# Altium PCB PCB1.PcbDoc
Units mil, origin at the board's own origin, x right, y up, seen from the top; angles counter-clockwise.
Board outline 2000 x 980 mil, 2 copper layers (Top Layer, Bottom Layer), stack 69.792 mil thick; 24 components, 19 nets, 60 pads, 89 vias.
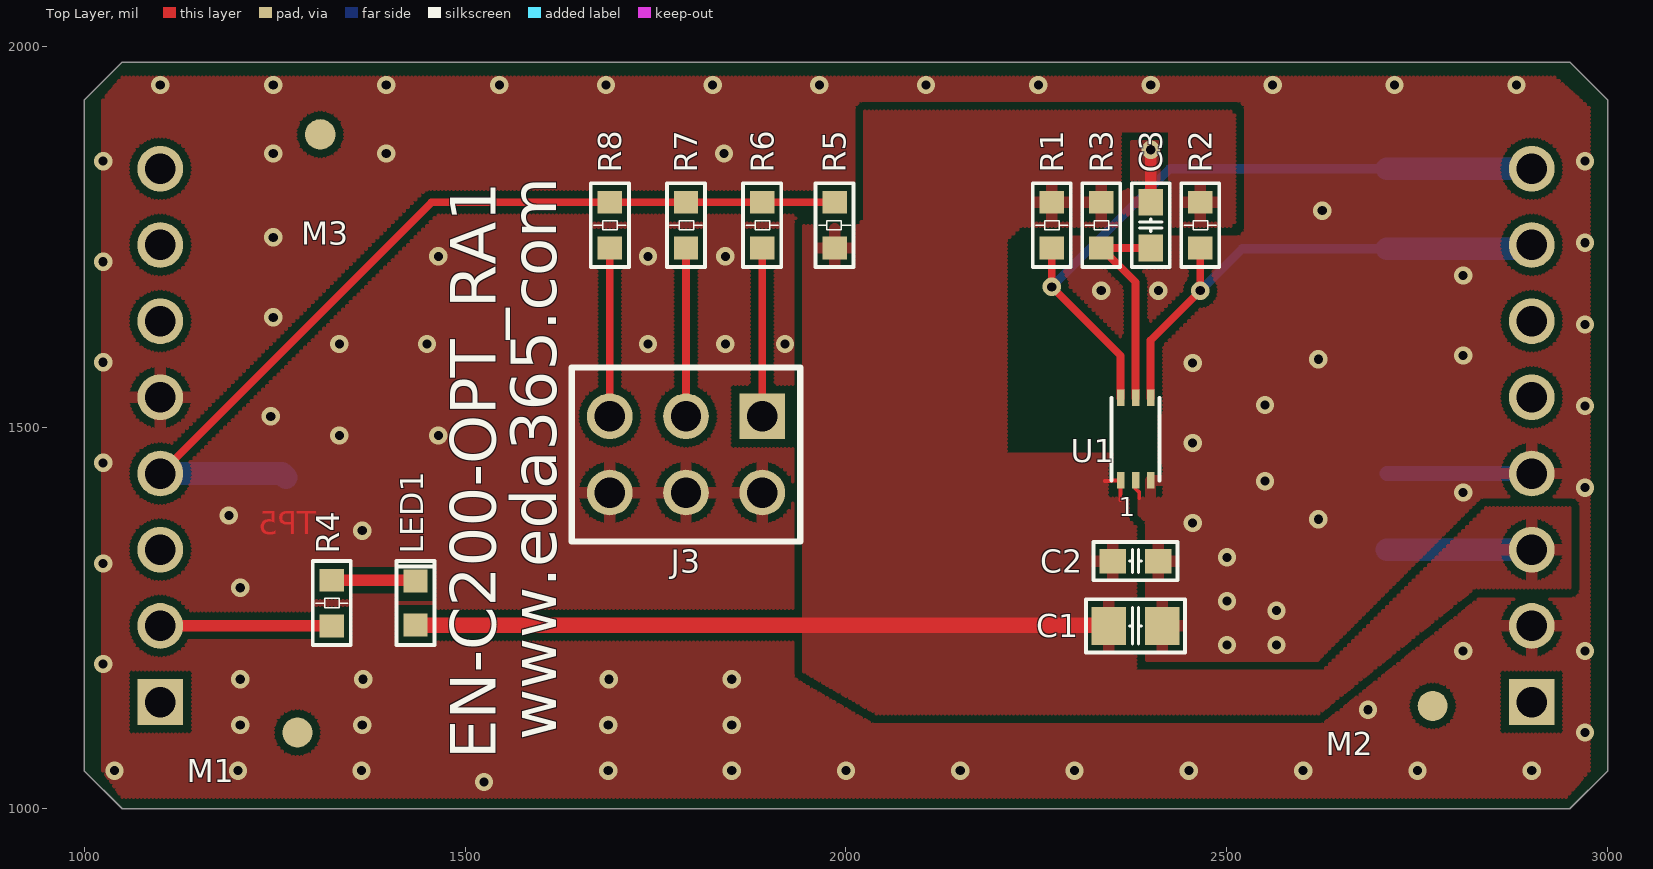
[diagram p0: Top Layer view]
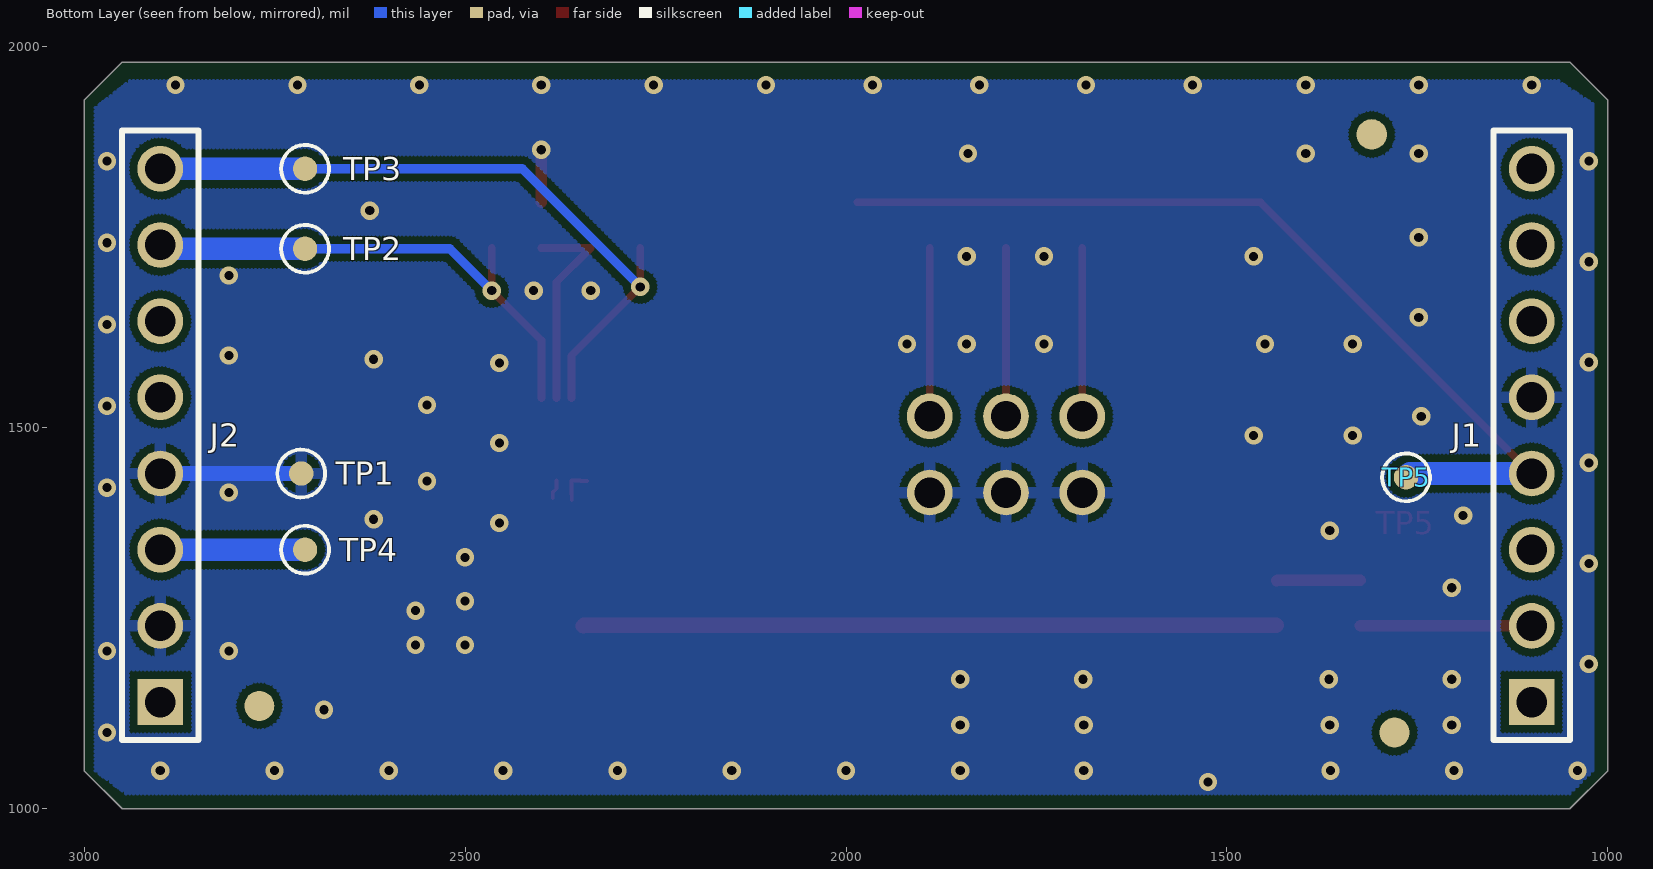
[diagram p1: Bottom Layer view, seen from below]

## Layer stack, top to bottom
Top Layer: signal copper 1.4
Dielectric: core 66.992, FR-4, Dk 4.2
Bottom Layer: signal copper 1.4

## Board outline
1050,1000 1000,1050 1000,1930 1050,1980 2950,1980 3000,1930 3000,1050 2950,1000

## Design rules (kind name [scope] priority, off if disabled: settings)
AssemblyTestPointUsage [All] p0: scope1count=1 scope1_0_kind=Board scope1_0_value=Board scope2count=1 scope2_0_kind=Board scope2_0_value=Board commentlength=0
AssemblyTestpoint [All] p0: scope1count=1 scope1_0_kind=Board scope1_0_value=Board scope2count=1 scope2_0_kind=Board scope2_0_value=Board commentlength=0
Clearance Clearance_2 [All] p0 off: scope1count=1 scope1_0_kind=Board scope1_0_value=Board scope2count=1 scope2_0_kind=Board scope2_0_value=Board commentlength=66 gap=12 // Protel DXP Scope 1 Expression Was: (OnLayer('Keep-Out Layer'))
Clearance Clearance_1 [All] p0 off: scope1count=1 scope1_0_kind=Board scope1_0_value=Board scope2count=1 scope2_0_kind=Board scope2_0_value=Board commentlength=45 gap=10 // Protel DXP Scope 1 Expression Was: Inpoly
Clearance [All] p0: scope1count=1 scope1_0_kind=Board scope1_0_value=Board scope2count=1 scope2_0_kind=Board scope2_0_value=Board commentlength=0 gap=6
Clearance Clearance_2 [(OnLayer('Keep-Out Layer'))] p1: gap=12
Clearance Clearance_1 [Inpoly] p2: gap=10
Clearance [All] p3: gap=6
ComponentClearance [All] p0: scope1count=1 scope1_0_kind=Board scope1_0_value=Board scope2count=1 scope2_0_kind=Board scope2_0_value=Board commentlength=0 gap=10 collisioncheckmode=3
DiffPairsRouting [All] p0: scope1count=1 scope1_0_kind=Board scope1_0_value=Board scope2count=1 scope2_0_kind=Board scope2_0_value=Board commentlength=0
FabricationTestPointUsage [All] p0: scope1count=1 scope1_0_kind=Board scope1_0_value=Board scope2count=1 scope2_0_kind=Board scope2_0_value=Board commentlength=0 valid=0 allowmultiple=FALSE
FabricationTestpoint [All] p0: scope1count=1 scope1_0_kind=Board scope1_0_value=Board scope2count=1 scope2_0_kind=Board scope2_0_value=Board commentlength=0 side=3 testpointundercomponent=TRUE minsize=40 maxsize=100 preferedsize=60 minholesize=0 maxholesize=40 preferedholesize=32 testpointgrid=1
FanoutControl Fanout_Default [All] p0: scope1count=1 scope1_0_kind=Board scope1_0_value=Board scope2count=1 scope2_0_kind=Board scope2_0_value=Board commentlength=30 // Fanout_Default (Default Rule)
FanoutControl Fanout_Small [All] p0 off: scope1count=1 scope1_0_kind=Board scope1_0_value=Board scope2count=1 scope2_0_kind=Board scope2_0_value=Board commentlength=84 // Protel DXP Scope 1 Expression Was: (CompPinCount < 5)   Fanout_Small (Default Rule)
FanoutControl Fanout_SOIC [All] p0 off: scope1count=1 scope1_0_kind=Board scope1_0_value=Board scope2count=1 scope2_0_kind=Board scope2_0_value=Board commentlength=71 // Protel DXP Scope 1 Expression Was: IsSOIC   Fanout_SOIC (Default Rule)
FanoutControl Fanout_LCC [All] p0 off: scope1count=1 scope1_0_kind=Board scope1_0_value=Board scope2count=1 scope2_0_kind=Board scope2_0_value=Board commentlength=69 // Protel DXP Scope 1 Expression Was: IsLCC   Fanout_LCC (Default Rule)
FanoutControl Fanout_BGA [All] p0 off: scope1count=1 scope1_0_kind=Board scope1_0_value=Board scope2count=1 scope2_0_kind=Board scope2_0_value=Board commentlength=69 // Protel DXP Scope 1 Expression Was: IsBGA   Fanout_BGA (Default Rule)
Height [All] p0: scope1count=1 scope1_0_kind=Board scope1_0_value=Board scope2count=1 scope2_0_kind=Board scope2_0_value=Board commentlength=0
HoleSize [All] p0: scope1count=1 scope1_0_kind=Board scope1_0_value=Board scope2count=1 scope2_0_kind=Board scope2_0_value=Board commentlength=0 absolutevalues=TRUE maxlimit=100 minlimit=1 maxpercent=80.000 minpercent=20.000
HoleToHoleClearance [All] p0: scope1count=1 scope1_0_kind=Board scope1_0_value=Board scope2count=1 scope2_0_kind=Board scope2_0_value=Board commentlength=0
LayerPairs [All] p0: scope1count=1 scope1_0_kind=Board scope1_0_value=Board scope2count=1 scope2_0_kind=Board scope2_0_value=Board commentlength=0 enforce=TRUE
MinimumSolderMaskSliver [All] p0: scope1count=1 scope1_0_kind=Board scope1_0_value=Board scope2count=1 scope2_0_kind=Board scope2_0_value=Board commentlength=0
MinimumSolderMaskSliver [All] p1: minsoldermaskwidth=4
NetAntennae [All] p0: scope1count=1 scope1_0_kind=Board scope1_0_value=Board scope2count=1 scope2_0_kind=Board scope2_0_value=Board commentlength=0
PasteMaskExpansion [All] p0: scope1count=1 scope1_0_kind=Board scope1_0_value=Board scope2count=1 scope2_0_kind=Board scope2_0_value=Board commentlength=0 expansion=0
PlaneClearance [All] p0: scope1count=1 scope1_0_kind=Board scope1_0_value=Board scope2count=1 scope2_0_kind=Board scope2_0_value=Board commentlength=0 clearance=20
PlaneConnect [All] p0: scope1count=1 scope1_0_kind=Board scope1_0_value=Board scope2count=1 scope2_0_kind=Board scope2_0_value=Board commentlength=0 planeconnectstyle=Relief reliefexpansion=20 reliefentries=4 reliefconductorwidth=10 reliefairgap=10
PolygonConnect PolygonConnect_1 [All] p0 off: scope1count=1 scope1_0_kind=Board scope1_0_value=Board scope2count=1 scope2_0_kind=Board scope2_0_value=Board commentlength=44 connectstyle=Direct reliefconductorwidth=10 reliefentries=4 polygonreliefangle="90 Angle" // Protel DXP Scope 1 Expression Was: isvia
PolygonConnect [All] p0: scope1count=1 scope1_0_kind=Board scope1_0_value=Board scope2count=1 scope2_0_kind=Board scope2_0_value=Board commentlength=0 connectstyle=Relief reliefconductorwidth=15 reliefentries=4 polygonreliefangle="90 Angle"
PolygonConnect PolygonConnect_1 [isvia] p1: connectstyle=Direct reliefconductorwidth=10 reliefentries=4 polygonreliefangle="90 Angle"
PolygonConnect [All] p2: connectstyle=Relief reliefconductorwidth=15 reliefentries=4 polygonreliefangle="90 Angle"
RoutingCorners [All] p0: scope1count=1 scope1_0_kind=Board scope1_0_value=Board scope2count=1 scope2_0_kind=Board scope2_0_value=Board commentlength=0 cornerstyle=45-Degree minsetback=100 maxsetback=100
RoutingLayers [All] p0: scope1count=1 scope1_0_kind=Board scope1_0_value=Board scope2count=1 scope2_0_kind=Board scope2_0_value=Board commentlength=0 top layer=Automatic bottom layer=Automatic
RoutingPriority [All] p0: scope1count=1 scope1_0_kind=Board scope1_0_value=Board scope2count=1 scope2_0_kind=Board scope2_0_value=Board commentlength=0
RoutingTopology [All] p0: scope1count=1 scope1_0_kind=Board scope1_0_value=Board scope2count=1 scope2_0_kind=Board scope2_0_value=Board commentlength=0 topology=Shortest
RoutingVias [All] p0: scope1count=1 scope1_0_kind=Board scope1_0_value=Board scope2count=1 scope2_0_kind=Board scope2_0_value=Board commentlength=0 holewidth=12 width=24 viastyle="Through Hole" minholewidth=12 minwidth=24 maxholewidth=12 maxwidth=24
RoutingVias [All] p1: holewidth=12 width=24 viastyle="Through Hole" minholewidth=12 minwidth=24 maxholewidth=12 maxwidth=24
ShortCircuit [All] p0: scope1count=1 scope1_0_kind=Board scope1_0_value=Board scope2count=1 scope2_0_kind=Board scope2_0_value=Board commentlength=0 allowed=FALSE
SilkToSilkClearance [All] p0: scope1count=1 scope1_0_kind=Board scope1_0_value=Board scope2count=1 scope2_0_kind=Board scope2_0_value=Board commentlength=0
SilkToSilkClearance [All] p1: silktosilkclearance=2
SilkscreenOverComponentPads [All] p0: scope1count=1 scope1_0_kind=Board scope1_0_value=Board scope2count=1 scope2_0_kind=Board scope2_0_value=Board commentlength=0
SilkscreenOverComponentPads [All] p1: minsilkscreentomaskgap=1
SolderMaskExpansion [All] p0: scope1count=1 scope1_0_kind=Board scope1_0_value=Board scope2count=1 scope2_0_kind=Board scope2_0_value=Board commentlength=0 expansion=2
SolderMaskExpansion [All] p1: expansion=2
UnRoutedNet [All] p0: scope1count=1 scope1_0_kind=Board scope1_0_value=Board scope2count=1 scope2_0_kind=Board scope2_0_value=Board commentlength=0
Width [All] p0: scope1count=1 scope1_0_kind=Board scope1_0_value=Board scope2count=1 scope2_0_kind=Board scope2_0_value=Board commentlength=0 maxlimit=40 minlimit=4 preferedwidth=10
Width [All] p1: maxlimit=40 minlimit=4 preferedwidth=10
25 further rules are at their usual default settings.

## Classes and differential pairs
component class EN-C200-OPT_RA1: C1 C2 C3 J1 J2 J3 LED1 R1 R2 R3 R4 R5 R6 R7 R8 TP1 TP2 TP3 TP4 TP5 U1

## Components (designator, comment, footprint, x,y, rotation, side; value= is the part's Value field where it differs from the comment)
C1 "22uF" SC0805 2380,1240 r0 top
C2 "100nF" SC0603 2380,1325 r0 top
C3 "1uF" SC0603 2400,1766 r90 top
J1 "SIP8-2.54mm Male" SIP-8P-100 1100,1490 r90 bottom locked
J2 "SIP8-2.54mm Male" SIP-8P-100 2900,1490 r90 bottom locked
J3 "SIP2x3-2.54mm" SIP-2x3P-100 1790,1465 r0 top
LED1 "LTST-C191KGKT" HSD0603-LED 1435,1270 r90 top
M1 "1-MARKFA" MARK#1 1280,1100 r0 top
M2 "1-MARKFA" MARK#1 2770,1135 r0 top
M3 "1-MARKFA" MARK#2 1310,1885 r0 top
R1 "10K" SR0603 2270,1766 r270 top
R2 "10K" SR0603 2465,1766 r270 top
R3 "1K" SR0603 2335,1766 r270 top
R4 "4.7K" SR0603 1325,1270 r270 top
R5 "10K" SR0603 1985,1766 r90 top
R6 "1K" SR0603 1890,1766 r270 top
R7 "10K" SR0603 1790,1766 r270 top
R8 "100K" SR0603 1690,1766 r270 top
TP1 "NC" TP32-SMD 2715,1440 r180 bottom
TP2 "NC" TP32-SMD 2710,1735 r90 bottom
TP3 "NC" TP32-SMD 2710,1840 r90 bottom
TP4 "NC" TP32-SMD 2710,1340 r90 bottom
TP5 "NC" TP32-SMD 1264.97,1435 r90 bottom
U1 "BH1750FVI" sop6-20-105 2380,1485 r90 top

## Footprints (in the part's own frame and the unit in brackets; to place one, negate y for a bottom-side part, rotate by r counter-clockwise, add the part's x,y. Pads: shape width x height; smd on the part's side, far side on the other; paste and mask are expansions set on the pad)
HSD0603-LED [mil] "HSD0603-LED"
  rect 30x32 smd: 1(-29,0) 2(29,0)
  silkscreen extent -55,-25 55,25
MARK#1 [mm]
  round 1 all layers, no hole: 1(0,0)
MARK#2 [mm]
  round 1.016 all layers, no hole: 1(0,0)
SC0603 [mil] "SC0603"
  rect 35x32 smd: 1(-30,0) 2(30,0)
  silkscreen extent -55,-25 55,25
SC0805 [mil] "SC0805"
  rect 45x50 smd: 1(-35,0) 2(35,0)
  silkscreen extent -65,-35 65,35
SIP-2x3P-100 [mil] "SIP-2X3P-100"
  rect 60x60 / inner round 60 / far side round 60 hole 40: 1(100,50)
  round 60 hole 40: 2(100,-50) 3(0,50) 4(0,-50) 5(-100,50) 6(-100,-50)
  silkscreen extent -150,-114 150,114
SIP-8P-100 [mil] "SIP-8P-100"
  rect 60x60 hole 40: 1(-350,0)
  round 60 hole 40: 2(-250,0) 3(-150,0) 4(-50,0) 5(50,0) 6(150,0) 7(250,0) 8(350,0)
  silkscreen extent -400,-50 400,50
sop6-20-105 [mm]
  rect 0.55x0.25 smd: 1(-1.375,0.5) 2(-1.375,0) 3(-1.375,-0.5) 4(1.375,-0.5) 5(1.375,0) 6(1.375,0.5)
  silkscreen extent -1.37,-0.8 1.38,0.8
SR0603 [mil] "SR0603"
  rect 30x32 smd: 1(-30,0) 2(30,0)
  silkscreen extent -55,-25 55,25
TP32-SMD [mil] "TP32-SMD"
  round 32 smd: 1(0,0)
  silkscreen extent -31,-31 31,31

## Part data
C1: library part "CAP NP", "Y5V-10V/-25℃～+85℃/(-20%～+80%)"
C2: library part "CAP NP", "X5R-50V/-55℃～+85℃/(±10%)"
C3: library part "CAP NP", "X5R-16V/-55℃～+85℃/(±10%)"
J1 J2: library part HEADER8, "8Pin 2.54mm排针-配高10mm/-40℃～+105℃"
J3: library part CON2X3, "2x3Pin 2.54mm排针-配高10mm/-40℃～+105℃"
LED1: library part LED, "绿色LED 2V-30mA/-55℃～+85℃"
M1 M2 M3: library part 1PIN
R1 R2 R3 R4 R5 R6 R7 R8: library part RESISTOR, "碳膜-1/10W/-55℃～+155℃/5%"
TP1 TP2 TP3 TP4 TP5: library part TP, "0.8MM焊盘"
U1: library part BH1750HVI, "16位数字输出型环境光强度传感器，I2C BUS/-40℃+85℃"

## Via types
v1: diameter 24, hole 12, Top Layer to Bottom Layer, 86 vias
v2: diameter 24, hole 12, Top Layer to Bottom Layer, tented both sides, 3 vias

## Nets (pads, with @x,y where several pads share a name; then routed paths per layer and width w, separated by ;. In a path a pad name is that pad's centre, name@x,y a point inside that pad or via, vN(x,y) a via of type N, cw(c..) or ccw(c..) an arc to the next point about the centre after c; other vN are vias at no path point)
GND: C1.2 C2.2 C3.2 J1.5 J2.2 J2.4 J3.2 J3.4 J3.6 TP1.1 U1.2 U1.3 | length 284.4
  Top Layer w5: U1.2 2380,1420 2385,1415 2385,1407.54
  Top Layer w15: C3.2 v2(2400,1865)
  Bottom Layer w20: TP1.1@2710,1440 J2.4
  other v1: 1525,1035 1040,1050 1202,1050 1364,1050 1688,1050 1850,1050 2000,1050 2150,1050 2300,1050 2450,1050 2600,1050 2750,1050 2900,1050 2970,1100 1205,1110 1365,1110 1688,1110 1850,1110 2685,1130 1205,1170 1366.25,1170 1688.75,1170 1850,1170 1025,1190 2810,1207.14 2970,1207.14 2500,1215 2565,1215 2565,1260 2500,1272.5 1205,1290 1025,1322 2500,1330 1365,1365 2455,1375 2620,1380 1190,1385 2810,1415 2970,1421.43 2550,1430 1025,1454 2455,1480 1335,1490 1465,1490 1245,1515 2970,1528.57 2550,1530 2455,1585 1025,1586 2620,1590 2810,1595 1335,1610 1450,1610 1740,1610 1841.67,1610 1920,1610 2970,1635.71 1248.33,1645 2335,1680 2410,1680 2810,1700 1025,1718 1465,1725 1740,1725 1841.67,1725 2970,1742.86 1248.33,1750 2625,1785 1025,1850 2970,1850 1248.33,1860 1396.67,1860 1840,1860 1100,1950 1248.33,1950 1396.67,1950 1545,1950 1685,1950 1825,1950 1965,1950 2105,1950 2252.5,1950 2400,1950 2560,1950 2720,1950 2880,1950
I2C_SCL_PC11: J2.8 R1.2 TP3.1 U1.6 | length 928.5
  Top Layer w10: R1.2 v2(2270,1685) 2360.31,1594.69 U1.6
  Bottom Layer w12: v2(2270,1685) 2425,1840 TP3.1
  Bottom Layer w30: TP3.1 J2.8
I2C_SDA_PC10: J2.7 R2.2 TP2.1 U1.4 | length 683.8
  Top Layer w10: U1.4 2399.68,1614.68 v2(2465,1680) R2.2
  Bottom Layer w12: v2(2465,1680) 2520,1735 TP2.1 ; J2.7@2895,1735 J2.7
  Bottom Layer w30: TP2.1 J2.7@2895,1735
NetC3_1: C3.1 R3.2 U1.5 | length 280.5
  Top Layer w10: U1.5 2380,1691 R3.2 C3.1
NetJ3_1: J3.1 R6.2 | length 221
  Top Layer w10: J3.1 R6.2
NetJ3_3: J3.3 R7.2 | length 221
  Top Layer w10: J3.3 R7.2
NetJ3_5: J3.5 R8.2 | length 221
  Top Layer w10: J3.5 R8.2
NetLED1_2: LED1.2 R4.1 | length 110.4
  Top Layer w15: R4.1 1434,1300 LED1.2
PA4: J1.1
PA5: J1.2 R4.2 | length 225
  Top Layer w15: J1.2 R4.2
PA6: J1.3
PA7: J1.4 R5.2 R6.1 R7.1 R8.1 TP5.1 | length 1199.5
  Top Layer w10: J1.4 1456,1796 R8.1 R7.1 R6.1 R5.2
  Bottom Layer w30: J1.4 1259.97,1440 TP5.1
PA11: J2.5
PA12: J2.6
PB5: J1.6
PB6: J1.7
PB7: J1.8
V3.3: C1.1 C2.1 J2.3 LED1.1 R1.1 R2.1 R3.1 R5.1 TP4.1 U1.1 | length 1147.1
  Top Layer w5: 2340,1430 2347.89,1430 2348.76,1430.87 U1.1 2360.31,1412.85 2360,1412.54 2360,1405
  Top Layer w20: LED1.1 2344,1241 C1.1
  Bottom Layer w30: TP4.1 J2.3
V5.0: J2.1
pads on no net: M1.1 M2.1 M3.1

## Polygon pours and split planes (outlines as drawn)
GND on Top Layer "Top Layer-No Net" (hatched 90Degree grid 5 track 5, remove dead copper, pour order 1000): 1025,1930 1050,1960 2930,1960 2975,1920 2975,1050 2945,1015 1050,1015 1025,1050
V3.3 on Top Layer "Top Layer-No Net" (hatched 90Degree grid 5 track 5, remove dead copper, pour order 1000): 2840,1395 2950,1395 2950,1290 2825,1290 2620,1125 2040,1125 1945,1180 1945,1765 2015,1765 2025,1775 2025,1915 2510,1915 2510,1765 2425,1765 2425,1890 2365,1890 2360,1885 2360,1765 2230,1765 2210,1745 2210,1465 2365,1465 2370,1460 2370,1380 2380,1370 2380,1180 2625,1180
GND on Bottom Layer "Top Layer-No Net" (hatched 90Degree grid 5 track 5, remove dead copper, pour order 1000): 1020,1925 1065,1955 2940,1955 2985,1920 2985,1050 2945,1020 1050,1020 1020,1050

## Silkscreen, mask and mechanical layers (free items; w line width, h text height)
Top Overlay:
  text "www.eda365.com" at 1620,1090 h60 r90
  text "EN-C200-OPT_RA1" at 1540,1065 h60 r90
Mechanical 1:
  the board outline again, w5
Mechanical 2:
  lines w5: 1100,1140 1130,1140 ; 2900,1140 2930,1140
  lines w6: 1070,1140 cw(c1100,1140) 1130,1140 cw(c1100,1140) 1070,1140 ; 2870,1140 cw(c2900,1140) 2930,1140 cw(c2900,1140) 2870,1140
  lines w8: 1050,1090 1050,1890 1150,1890 1150,1090 1050,1090 ; 2850,1090 2850,1890 2950,1890 2950,1090 2850,1090

## Text inside footprints (layer, text, board x,y; h text height)
U1: Top Overlay "1" at 2358,1384 h25; Top Layer "TP5" at 1305,1360 h30